# Altium PCB ST1-2-BASIS.PcbDoc (part 2 of 2)
Units mm, origin at the board's own origin, x right, y up, seen from the top; angles counter-clockwise.
Board outline 88 x 170 mm, 2 copper layers (Top Layer, Bottom Layer), stack 1.58 mm thick; 149 components, 86 nets, 501 pads, 138 vias.
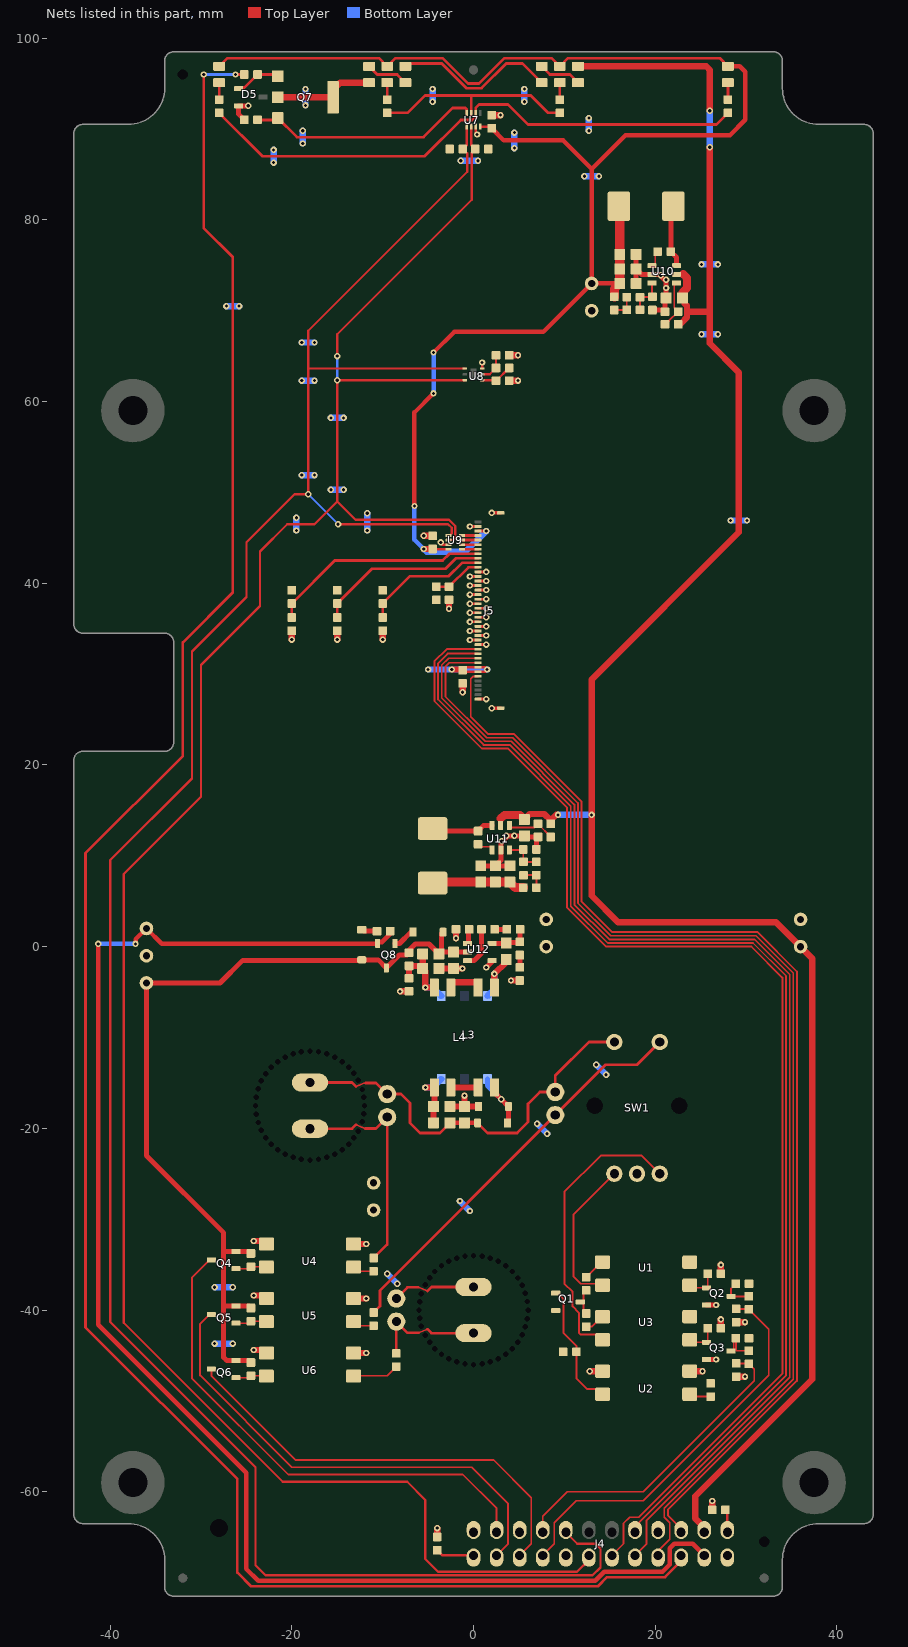
[diagram p2: the nets of this part, all layers, seen from the top]

## Part data (continued)
U9: "LP5816 4-Channel I2C Interface RGBW LED Driver", JLC Type=Extended, Manufacturer="Texas Instruments", Manufacturer 3=TI, Package=SOT586, Supplier Part Number 1=296-LP5816DRLRCT-ND, HelpURL=https://www.ti.com/lit/ds/symlink/lp5816.pdf, Manufacturer 1="Texas Instruments", Manufacturer Part Number 1=LP5816DRLR, Manufacturer Part Number 3=LP5816DRLR, Part Number=LP5816DRLR, Supplier 1=Digi-Key, Supplier 3=LCSC, Supplier Part Number 3=C47262832
U10 U11: "4-V to 36-V, 600-mA, Synchronous Step-Down Converter", Manufacturer="Texas Instruments", Manufacturer Part Number 1=LV3842XFDBVR, Package=SOT23, Supplier Part Number 1=296-LV3842XFDBVR-ND, HelpURL=https://www.ti.com/lit/ds/symlink/lv3842.pdf, Manufacturer 1="Texas Instruments", Manufacturer 3="Texas Instruments", Manufacturer Part Number 3=LV3842XFDBVR, Part Number=LV3842XF, Supplier 1=Digi-Key, Supplier 3=LCSC, Supplier Part Number 3=C22428295
U12: "TPS60400 Unregulated 60-mA Charge Pump Voltage Inverter", JLC Type=Extended, Manufacturer="Texas Instruments", Manufacturer 3=TI, Manufacturer Part Number 1=TPS60400DBVR, Manufacturer Part Number 2=TPS60400DBVT, Package=SOT23-5, Supplier Part Number 1=296-27004-1-ND, HelpURL=https://www.ti.com/lit/ds/symlink/tps60400.pdf, Manufacturer 1="Texas Instruments", Manufacturer 2="Texas Instruments", Manufacturer Part Number 3=TPS60400DBVR, Part Number=TPS60400, Supplier 1=Digi-Key, Supplier 2=Digi-Key, Supplier 3=LCSC, Supplier Part Number 2=296-12013-1-ND, Supplier Part Number 3=C9839

## Free pads (board coordinates)
  round 0 hole 2 unplated: 2(-28,-64)
  round 0 hole 0.6 unplated: B(-24,-17.5) B(-23.926,-18.439) B(-23.926,-16.561) B(-23.706,-19.354) B(-23.706,-15.646) B(-23.346,-20.224) B(-23.346,-14.776) B(-22.854,-21.027) B(-22.854,-13.973) B(-22.243,-21.743) B(-22.243,-13.257) B(-21.527,-22.354) B(-21.527,-12.646) B(-20.724,-22.846) B(-20.724,-12.154) B(-19.854,-23.206) B(-19.854,-11.794) B(-18.939,-23.426) B(-18.939,-11.574) B(-18,-23.5) B(-18,-11.5) B(-17.061,-23.426) B(-17.061,-11.574) B(-16.146,-23.206) B(-16.146,-11.794) B(-15.276,-22.846) B(-15.276,-12.154) B(-14.473,-22.354) B(-14.473,-12.646) B(-13.757,-21.743) B(-13.757,-13.257) B(-13.17,-21.06) B(-13.17,-13.94) B(-12.692,-14.704) B(-12.692,-20.296) B(-12.269,-15.724) B(-12.269,-19.276) B(-12.068,-16.602) B(-12.068,-18.398) B(-12,-17.5) B(-6,-40) B(-5.932,-40.898) B(-5.932,-39.102) B(-5.731,-41.776) B(-5.731,-38.224) B(-5.308,-42.796) B(-5.308,-37.204) B(-4.83,-43.56) B(-4.83,-36.44) B(-4.243,-44.243) B(-4.243,-35.757) B(-3.527,-44.854) B(-3.527,-35.146) B(-2.724,-45.346) B(-2.724,-34.654) B(-1.854,-45.706) B(-1.854,-34.294) B(-0.939,-45.926) B(-0.939,-34.074) B(0,-46) B(0,-34) B(0.939,-45.926) B(0.939,-34.074) B(1.854,-45.706) B(1.854,-34.294) B(2.724,-45.346) B(2.724,-34.654) B(3.527,-44.854) B(3.527,-35.146) B(4.243,-44.243) B(4.243,-35.757) B(4.854,-43.527) B(4.854,-36.473) B(5.346,-42.724) B(5.346,-37.276) B(5.706,-41.854) B(5.706,-38.146) B(5.926,-40.939) B(5.926,-39.061) B(6,-40)
  round 7 hole 3.2: M(-37.5,-59) M(-37.5,59) M(37.5,-59) M(37.5,59)

## Via types
v1: diameter 0.7, hole 0.35, Top Layer to Bottom Layer, tented both sides, 138 vias

## Nets (pads, with @x,y where several pads share a name; then routed paths per layer and width w, separated by ;. In a path a pad name is that pad's centre, name@x,y a point inside that pad or via, vN(x,y) a via of type N, cw(c..) or ccw(c..) an arc to the next point about the centre after c; other vN are vias at no path point)
+3V3: C4.1 C5.1 C16.1 C17.1 C18.1 D10.2 J5.33 J5.34 L2.2 Q8.1@-8.65,0.35 R1.1 R4.1 R7.1 R24.1 R25.1 R27.1 R29.1 R30.1 R31.1 R35.1 R42.1 TP2.1 U1.4 U3.4 U8.1@0.95,62.35 | length 65
  Top Layer w0.25: U8.1@0.95,62.35 2.425,62.35 C5.1@2.475,62.3 2.5,62.3 3.9,63.7 R27.1@3.925,63.7
  Top Layer w0.3: C4.1@-1.2,30.425 -1.112,30.338 -1.025,30.25 J5.34@0.5,30.25 1.25,30.25 v1(1.5,30.5) 1.25,30.75 J5.33@0.5,30.75 -0.875,30.75 C4.1@-1.2,30.425
  Top Layer w0.55: Q8.1@-8.65,0.35 -8.15,0.35 -6.9,1.6 D10.2@-6.65,1.6
  Top Layer w0.7: v1(-2.4,30.5) -1.275,30.5 C4.1@-1.2,30.425
  Top Layer w1: L2.2@-4.5,7 -4.4,7.1 C16.1@0.8,7.1 C17.1@2.4,7.1 C18.1@4,7.1 4.6,6.5 R42.1@5.475,6.5
  Bottom Layer w0.7: v1(-28.5,-43.7) v1(-26.5,-43.7) ; v1(-28.5,-37.5) v1(-26.5,-37.5) ; v1(-27.2,70.5) v1(-25.8,70.5) ; v1(-22,86.3) v1(-22,87.7) ; v1(-19.5,45.8) v1(-19.5,47.2) ; v1(-18.9,51.9) v1(-17.5,51.9) ; v1(-18.9,62.3) v1(-17.5,62.3) ; v1(-18.9,66.5) v1(-17.5,66.5) ; v1(-18.8,88.4) v1(-18.8,89.8) ; v1(-18.5,92.6) v1(-18.5,94.4) ; v1(-15.7,50.3) v1(-14.3,50.3) ; v1(-15.7,58.2) v1(-14.3,58.2) ; v1(-11.7,45.8) v1(-11.7,47.7) ; v1(-5,30.5) v1(-2.4,30.5) v1(1.5,30.5) ; v1(-4.5,93) v1(-4.5,94.4) ; v1(-1.4,86.5) v1(0.5,86.5) ; v1(4.5,87.9) v1(4.5,89.6) ; v1(5.6,93) v1(5.6,94.4) ; v1(12.2,84.8) v1(13.8,84.8) ; v1(12.7,89.8) v1(12.7,91.2) ; v1(25.1,67.4) v1(26.9,67.4) ; v1(25.1,75.1) v1(26.9,75.1) ; v1(28.3,46.9) v1(30.1,46.9)
+3V3_CB: C14.2 U11.1@2.05,10.65 | length 1.9
  Top Layer w0.2: C14.2@0.5,11.275 0.775,11 1.9,11 2.05,10.85 U11.1@2.05,10.65
+3V3_EN: R41.2 R43.1 U11.4 | length 5.5
  Top Layer w0.2: U11.4@3.95,13.35 4.2,13.1 6.675,13.1 R43.1@7.1,13.525 7.1,13.5 8.5,12.1 R41.2@8.5,12.075
+3V3_FB: C19.2 R44.2 R45.1 U11.3 | length 4.3
  Top Layer w0.2: U11.3@3.95,10.65 5.425,10.65 R45.1@5.475,10.7 5.475,9.35 R44.2@5.5,9.325 C19.2@6.9,9.325
+3V3_GAIN_MEAS: C19.1 R42.2 R44.1 | length 2.8
  Top Layer w0.2: R44.1@5.5,7.875 C19.1@6.9,7.875 6.925,7.85 R42.2@6.925,6.5
+3V3_OFF: C25.1 C28.1 D10.1 D12.1 Q4.2 Q5.2 Q6.2 Q8.3 R11.1 R13.1 R15.1 R49.1 TP5.1 U12.2 | length 95
  Top Layer w0.55: R15.1@-24.5,-45.775 -24.725,-45.55 Q6.2@-26.15,-45.55 -27.15,-45.55 -27.5,-45.2 -27.5,-39.55 ; R13.1@-24.5,-39.775 -24.725,-39.55 Q5.2@-26.15,-39.55 -27.5,-39.55 ; R11.1@-24.5,-33.775 -24.725,-33.55 Q4.2@-26.15,-33.55 -27.5,-33.55 ; D12.1@-12.3,-1.5 -25.4,-1.5 -27.9,-4 TP5.1@-36,-4 -36,-23 -27.5,-31.5 -27.5,-33.55 ; D12.1@-12.3,-1.45 -10.5,-1.45 Q8.3@-9.6,-2.35 -8.15,-0.9 -7.325,-0.9 R49.1@-7.1,-0.675 -7.1,-0.4 -6.4,0.3 -4.9,0.3 C28.1@-3.8,-0.8 -3.5,-0.5 -3.5,1.45 D10.1@-3.35,1.6 ; C28.1@-3.6,-0.6 C25.1@-2.2,-0.6 U12.2@-0.65,-0.6 ; -27.5,-39.55 -27.5,-33.55
+3V3_STBY: J4.22 Q8.2 R48.1 TP4.1 | length 164.3
  Top Layer w0.5: v1(-41.3,0.3) -41.3,-41.6 -25,-57.9 -25,-68.5 -23.7,-69.8 13.4,-69.8 14.4,-68.8 20.8,-68.8 21.59,-68.01 21.59,-66.238 22.098,-65.73 24.13,-65.73 J4.22@25.4,-67 ; v1(-37.2,0.3) -37.2,0.8 TP4.1@-36,2 -34.3,0.3 Q8.2@-10.6,0.3
  Top Layer w0.55: Q8.2@-10.6,0.3 Q8.2@-10.55,0.35 -10.4,0.5 -10.1,0.5 -9.175,1.425 R48.1@-9.175,1.7
  Bottom Layer w0.5: v1(-41.3,0.3) v1(-37.2,0.3)
+3V3_SW: C14.1 L2.1 U11.6 | length 6.9
  Top Layer w0.55: L2.1@-4.5,13 -4.225,12.725 C14.1@0.5,12.725 1.125,13.35 U11.6@2.05,13.35
+15V: C9.1 C15.1 D1.2 J4.21 R36.1 R41.1 TP3.1 U10.5 U11.5 | length 231.8
  Top Layer w0.55: U11.5@2.99,13.35 2.99,14.09 ; U10.5@22.35,74.01 23.09,74.01
  Top Layer w0.7: C15.1@5.6,14 6.2,14.6 7.8,14.6 R41.1@8.5,13.9 ; R41.1@8.5,13.525 R41.1@8.5,13.9 ; v1(9.3,14.5) 9.1,14.5 R41.1@8.5,13.9 ; D1.2@11.5,96.9 25.6,96.9 26,96.5 v1(26,92) ; R36.1@22.525,68.5 22.65,68.625 22.851,68.625 23.5,69.274 23.5,69.9 ; C9.1@23,71.4 23.25,71.15 23.25,70.776 23.5,70.526 23.5,69.9 ; J4.21@25.4,-64.46 25.4,-63.952 24.4,-62.952 24.4,-60.5 37.3,-47.6 37.3,-1.3 33.3,2.7 15.9,2.7 13,5.6 v1(13,14.5) 13,29.4 29.2,45.6 29.2,63.2 26,66.4 26,69.9 ; v1(26,88) 26,69.9 ; 23.5,69.9 26,69.9
  Top Layer w0.9: 2.99,14.09 3.4,14.5 5.1,14.5 C15.1@5.6,14 ; C9.1@23,71.4 23,72 23.5,72.5 23.5,73.6 23.09,74.01
  Bottom Layer w0.7: v1(9.3,14.5) v1(13,14.5) ; v1(26,88) v1(26,92)
BACKLIGHT.0: J5.7 U9.5 | length 1.8
  Top Layer w0.3: U9.5@-1.26,43.75 J5.7@0.5,43.75
BACKLIGHT.1: J5.6 U9.6 | length 1.8
  Top Layer w0.3: U9.6@-1.26,44.25 J5.6@0.5,44.25
BACKLIGHT.2: J5.5 U9.7 | length 1.8
  Top Layer w0.3: U9.7@-1.26,44.75 J5.5@0.5,44.75
BACKLIGHT.3: J5.4 U9.8 | length 1.8
  Top Layer w0.3: U9.8@-1.26,45.25 J5.4@0.5,45.25
BTN_ESC_ISO: J1.2 R12.1 SW2.2 | length 25.4
  Top Layer w0.2: -12.931,-19.6 -11.936,-20.012
  Top Layer w0.3: SW2.2@-18,-20.04 -13.372,-20.04 -12.931,-19.6 ; -11.936,-20.012 -10.742,-20.012 J1.2@-9.5,-18.77 -9.5,-32.775 R12.1@-11,-34.275
BTN_OK_ISO: J2.2 R14.1 SW1.2 | length 44.8
  Top Layer w0.3: R14.1@-11,-40.275 -10.3,-39.575 -10.3,-37.84 J2.2@9,-18.54 14.54,-13 18,-13 SW1.2@20.5,-10.5
BTN_OUT_ISO: J3.2 R16.1 SW3.2 | length 12.8
  Top Layer w0.2: -6.064,-42.512 -5.069,-42.1
  Top Layer w0.3: R16.1@-8.5,-44.775 J3.2@-8.5,-41.27 -7.258,-42.512 -6.064,-42.512 ; -5.069,-42.1 -4.628,-42.54 SW3.2@0,-42.54
BUTTON.ESC: J4.3 Q4.3 | length 56.1
  Top Layer w0.2: Q4.3@-28.85,-34.5 -29.075,-34.5 -31,-36.425 -31,-47.5 -20.4,-58.1 -1.2,-58.1 2.54,-61.84 J4.3@2.54,-64.46
BUTTON.OK: J4.4 Q5.3 | length 53.3
  Top Layer w0.2: Q5.3@-28.85,-40.5 -29.075,-40.5 -30.1,-41.525 -30.1,-47.2 -20,-57.3 -0.2,-57.3 3.81,-61.31 3.81,-65.73 J4.4@2.54,-67
BUTTON.OUT: J4.6 Q6.3 | length 48.4
  Top Layer w0.2: Q6.3@-28.85,-46.5 -28.85,-47.25 -19.6,-56.5 2.2,-56.5 6.35,-60.65 6.35,-65.73 J4.6@5.08,-67
DISPLAY.CS: J4.16 J5.31 | length 136.3
  Top Layer w0.2: J5.31@0.5,31.75 -2.75,31.75 -3.5,31 -3.5,27.369 1.269,22.6 4.131,22.6 11.1,15.631 11.1,4.631 14.931,0.8 30.931,0.8 34.8,-3.069 34.8,-47.4 19.05,-63.15 19.05,-65.73 J4.16@17.78,-67
DISPLAY.MISO: J4.19 J5.35 | length 127.3
  Top Layer w0.2: J5.35@0.5,29.75 -0.05,29.75 -0.3,29.5 -0.3,25.3 1.6,23.4 4.463,23.4 11.9,15.963 11.9,4.963 15.263,1.6 31.263,1.6 35.6,-2.737 35.6,-47.8 21.4,-62 21.4,-62.6 22.86,-64.06 J4.19@22.86,-64.46
DISPLAY.MOSI: J4.18 J5.32 | length 135.2
  Top Layer w0.2: J5.32@0.5,31.25 -2.65,31.25 -3.1,30.8 -3.1,27.534 1.434,23 4.297,23 11.5,15.797 11.5,4.797 15.097,1.2 31.097,1.2 35.2,-2.903 35.2,-47.6 21,-61.8 21,-62.8 21.59,-63.39 21.59,-65.222 20.32,-66.492 J4.18@20.32,-67
DISPLAY.SCK: J4.15 J5.30 | length 134.3
  Top Layer w0.2: J5.30@0.5,32.25 -2.85,32.25 -3.9,31.2 -3.9,27.203 1.103,22.2 3.966,22.2 10.7,15.466 10.7,4.466 14.766,0.4 30.766,0.4 34.4,-3.234 34.4,-47.2 17.78,-63.82 J4.15@17.78,-64.46
DISPLAY.WR: J4.14 J5.29 | length 139
  Top Layer w0.2: J5.29@0.5,32.75 -2.95,32.75 -4.3,31.4 -4.3,27.037 0.937,21.8 3.8,21.8 10.3,15.3 10.3,4.3 14.6,0 30.6,0 34,-3.4 34,-47 18.2,-62.8 17.2,-62.8 16.51,-63.49 16.51,-65.73 J4.14@15.24,-67
ENCODER.A: C1.1 J4.8 R3.2 | length 44
  Top Layer w0.2: J4.8@7.62,-67 8.89,-65.73 8.89,-63.41 11.3,-61 18.7,-61 32.5,-47.2 32.5,-42.125 R3.2@30.3,-39.925 30.275,-39.9 28.925,-39.9 C1.1@28.9,-39.875
ENCODER.B: C2.1 J4.7 R9.2 | length 35.2
  Top Layer w0.2: J4.7@7.62,-63.98 J4.7@7.62,-64.46 7.62,-62.68 10.3,-60 18.7,-60 30.9,-47.8 30.9,-46.525 R9.2@30.3,-45.925 30.275,-45.9 28.925,-45.9 C2.1@28.9,-45.875
ENCODER_A: Q2.3 R1.2 R3.1 | length 3.6
  Top Layer w0.2: R1.2@28.875,-37.1 28.35,-37.625 Q2.3@28.35,-38.5 30.275,-38.5 R3.1@30.3,-38.475
ENCODER_B: Q3.3 R7.2 R9.1 | length 4.4
  Top Layer w0.2: Q3.3@28.35,-44.5 28.463,-44.5 28.638,-44.325 28.638,-43.337 R7.2@28.875,-43.1 28.875,-44.358 28.992,-44.475 R9.1@30.3,-44.475
GND: C1.2 C2.2 C3.2 C4.2 C5.2 C6.2 C7.2 C9.2 C10.2 C11.2 C12.2 C15.2 C16.2 C17.2 C18.2 C23.2 C25.2 C26.2 C29.2 D5.2 J4.1 J4.5 J4.10 J4.17 J4.24 J5.2 J5.12 J5.13 J5.14 J5.15 J5.16 J5.17 J5.18 J5.19 J5.20 J5.21 J5.22 J5.23 J5.24 J5.25 J5.26 J5.27 J5.28 J5.40 J5.M1 J5.M2 Q2.2 Q3.2 R6.2 R10.2 R17.1 R18.2 R26.2 R28.2 R32.2 R33.2 R34.2 R38.2 R40.2 R43.2 R45.2 R50.2 TP7.1 TP8.1 TP9.1 TP10.1 U2.2 U4.3 U5.3 U6.3 U7.3 U8.3 U9.3 U10.2 U11.2 U12.4 | length 77.9
  Top Layer w0.25: U8.3@0.95,63.65 v1(0.95,64.3)
  Top Layer w0.3: v1(-3.6,44.5) -3.35,44.25 U9.3@-2.74,44.25 ; v1(-0.4,33.75) J5.27@0.5,33.75 ; v1(-0.4,34.75) J5.25@0.5,34.75 ; v1(-0.4,35.75) J5.23@0.5,35.75 ; v1(-0.4,36.75) J5.21@0.5,36.75 ; v1(-0.4,37.75) J5.19@0.5,37.75 ; v1(-0.4,38.75) J5.17@0.5,38.75 ; v1(-0.4,39.75) J5.15@0.5,39.75 ; v1(-0.4,40.75) J5.13@0.5,40.75 ; v1(-0.4,46.25) J5.2@0.5,46.25 ; U7.3@0.25,90.26 0.25,89.55 v1(0.4,89.4) ; J5.40@0.5,27.25 v1(1.4,27.25) ; J5.28@0.5,33.25 v1(1.4,33.25) ; J5.26@0.5,34.25 v1(1.4,34.25) ; J5.24@0.5,35.25 v1(1.4,35.25) ; J5.22@0.5,36.25 v1(1.4,36.25) ; J5.20@0.5,37.25 v1(1.4,37.25) ; J5.18@0.5,38.25 v1(1.4,38.25) ; J5.16@0.5,39.25 v1(1.4,39.25) ; J5.14@0.5,40.25 v1(1.4,40.25) ; J5.12@0.5,41.25 v1(1.4,41.25)
  Top Layer w0.4: v1(2,26.25) J5.M2@3,26.25 ; v1(2,47.75) J5.M1@3,47.75
  Top Layer w0.55: R26.2@-25.225,91 -25.85,91.625 D5.2@-25.85,92.55 v1(-24.8,92.55) ; C16.2@0.8,8.9 C17.2@2.4,8.9 ; v1(1.4,-2.3) 2.05,-1.65 U12.4@2.05,-1.55 ; C18.2@4,8.9 C17.2@2.4,8.9 ; R45.2@6.925,10.7 6.925,11.9 R43.2@7.1,12.075 5.725,12.075 C15.2@5.6,12.2 v1(4.5,12.2) v1@3.8,12.2 ; C12.2@17.9,73 C11.2@17.9,74.6 ; C10.2@17.9,76.2 C11.2@17.9,74.6 ; R40.2@19.7,70.075 20.9,70.075 R38.2@21.075,69.9 21.075,71.275 C9.2@21.2,71.4 21.2,73.2 20.4,74 18.5,74 C11.2@17.9,74.6 ; Q3.2@25.65,-45.45 v1(26.7,-45.45) ; Q2.2@25.65,-39.45 v1(26.7,-39.45) ; C17.2@2.4,8.9 3,9.5 U11.2@3,10.65 3,11.4 3.15,11.55 v1@3.546,11.946 ; v1@3.546,11.946 v1@3.8,12.2 ; v1@3.546,11.946 3.7,12.1 v1@3.8,12.2
  Top Layer w0.7: v1(-24.2,-44.4) -23.13,-44.4 U6.3@-22.8,-44.73 ; v1(-24.2,-38.4) -23.13,-38.4 U5.3@-22.8,-38.73 ; v1(-24.2,-32.4) -23.13,-32.4 U4.3@-22.8,-32.73 ; v1(-20,33.8) R34.2@-20,34.775 ; v1(-15,33.8) R33.2@-15,34.775 ; v1(-10,33.8) R32.2@-10,34.775 ; v1(-8.075,-4.925) R50.2@-7.1,-4.925 ; v1(-5.475,45.225) C7.2@-4.5,45.225 ; R17.1@-4,-64.975 v1(-4,-64) ; C29.2@-3.8,-2.4 C25.2@-2.2,-2.4 v1(-1.225,-2.4) ; v1(-2.7,37.2) C6.2@-2.7,38.175 ; v1(-1.925,0.925) C26.2@-1.925,1.9 ; v1(-1.2,28) C4.2@-1.2,28.975 ; C3.2@2,91.525 v1(2.975,91.525) ; C5.2@3.925,62.3 v1(4.9,62.3) ; R28.2@3.925,65.1 v1(4.9,65.1) ; v1(4.125,-3.725) C23.2@5.1,-3.725 ; U2.2@23.8,-46.73 v1(25.2,-46.73) ; R18.2@26.275,-62 v1(26.275,-61.025) ; R10.2@27.225,-42 v1(27.225,-41.025) ; R6.2@27.225,-36 v1(27.225,-35.025) ; C2.2@28.9,-47.325 v1(29.875,-47.325) ; C1.2@28.9,-41.325 v1(29.875,-41.325)
  other v1: 3.1,11.6 3.6,12.2 21.2,72.5 21.2,73.4 20.6,73.9
GND_ISO: C24.2 C27.2 D13.2 SW1.C TP11.1 U2.3 U4.2 U5.2 U6.2 | length 9.9
  Top Layer w0.7: U6.2@-13.2,-44.73 v1(-11.8,-44.73) ; U5.2@-13.2,-38.73 v1(-11.8,-38.73) ; U4.2@-13.2,-32.73 v1(-11.8,-32.73) ; C27.2@-2.6,-17.6 C24.2@-1,-17.6 ; v1(-1,-16.4) C24.2@-1,-17.6 ; D13.2@0.55,-17.6 C24.2@-1,-17.6 ; v1(12.8,-46.73) U2.3@14.2,-46.73
HV_DET: J4.20 R19.1 | length 235.6
  Top Layer w0.3: v1(-29.7,96) -29.7,79.1 -26.5,75.9 -26.5,39 -32,33.5 -32,21 -42.7,10.3 -42.7,-41.9 -26,-58.6 -26,-68.9 -24.5,-70.4 13.7,-70.4 14.7,-69.4 21.1,-69.4 22.86,-67.64 J4.20@22.86,-67 ; v1(-26.2,96) R19.1@-25.225,96
  Bottom Layer w0.3: v1(-29.7,96) v1(-26.2,96)
I2C.SCL: J4.9 R25.2 U7.1@-0.75,90.26 U8.4 U9.1@-2.74,45.25 | length 263.6
  Top Layer w0.25: -24.398,-56.902 -40,-41.3 -40,9.5 -31,18.5 -31,32.5 -25,38.5 -25,44.5 -19.7,49.8 v1(-18.2,49.8) -18.2,63.65 ; -24.395,-56.905 -24,-57.3 -24,-68.1 -22.9,-69.2 13.1,-69.2 13.97,-68.33 13.97,-66.238 13.462,-65.73 11.43,-65.73 J4.9@10.16,-64.46 ; v1(-14.9,46.5) -2.8,46.5 -2.4,46.1 -2.4,45.5 -2.65,45.25 U9.1@-2.74,45.25 ; U8.4@-0.95,63.65 -18.2,63.65 ; U7.1@-0.75,90.26 -0.75,88.225 R25.2@-1.175,87.8 -0.7,87.325 -0.7,85.3 -18.2,67.8 -18.2,63.65
  Bottom Layer w0.2: v1(-18.2,49.8) v1(-14.9,46.5)
I2C.SDA: J4.12 R24.2 U7.2 U8.6 U9.2 | length 247.3
  Top Layer w0.25: v1(-15,65) -15,67.4 -0.2,82.2 -0.2,87.425 R24.2@0.175,87.8 -0.25,88.225 U7.2@-0.25,90.26 ; U9.2@-2.74,44.75 -2.25,44.75 -2,45 -2,46.3 -2.7,47 -13,47 -15,49 ; U8.6@-0.95,62.35 v1(-15,62.35) -15,49 ; J4.12@12.7,-67 12.7,-67.5 11.4,-68.8 -3.9,-68.8 -5.3,-67.4 -5.3,-60.9 -7.3,-58.9 -21,-58.9 -38.496,-41.404 -38.496,8.004 -30,16.5 -30,31 -23.5,37.5 -23.5,43.5 -20.5,46.5 -17.5,46.5 -15,49
  Bottom Layer w0.25: v1(-15,62.35) v1(-15,65)
LCD_IM0: J5.10 R29.2 R32.1 | length 13.9
  Top Layer w0.3: R32.1@-10,36.225 R29.2@-10,37.775 -7,40.775 -2.725,40.775 -1.25,42.25 J5.10@0.5,42.25
LCD_IM1: J5.9 R30.2 R33.1 | length 19.1
  Top Layer w0.3: R33.1@-15,36.225 R30.2@-15,37.775 -11.175,41.6 -3.1,41.6 -1.95,42.75 J5.9@0.5,42.75
LCD_IM2: J5.8 R31.2 R34.1 | length 24.3
  Top Layer w0.3: R34.1@-20,36.225 R31.2@-20,37.775 -15.275,42.5 -3.4,42.5 -2.65,43.25 J5.8@0.5,43.25
LCD_RESET: C6.1 J5.11 R35.2 | length 5.5
  Top Layer w0.3: R35.2@-4.1,39.625 C6.1@-2.7,39.625 -0.575,41.75 J5.11@0.5,41.75
NetC20_1: C20.1 C21.1 R46.1 U12.5 | length 4.5
  Top Layer w0.55: U12.5@2.05,0.35 3.55,0.35 3.663,0.463 5.038,0.463 R46.1@5.1,0.525 5.1,1.875 C21.1@5.125,1.9
NetC20_2: C20.2 L3.1@2.3,-4.5 L4.3 | length 6.4
  Top Layer w0.7: L3.1@2.3,-4.5 v1(2.3,-3) 3.6,-1.7 C20.2@3.6,-1.4
  Bottom Layer w0.7: L4.3@1.54,-5.43 2.3,-4.67 v1(2.3,-3)
NetC21_2: C21.2 R47.1 | length 1.3
  Top Layer w0.55: R47.1@2.325,1.9 C21.2@3.675,1.9
NetC22_2: C22.2 C27.1 L3.5 L4.6 | length 7.1
  Top Layer w0.7: v1(-5.3,-15.5) L3.5@-4.3,-15.5 -4.3,-17.5 C27.1@-4.4,-17.6 C22.2@-4.4,-19.4
  Bottom Layer w0.7: v1(-5.3,-15.5) -4.47,-15.5 L4.6@-3.54,-14.57
NetC23_1: C23.1 R46.2 | length 1.3
  Top Layer w0.55: C23.1@5.1,-2.275 R46.2@5.1,-0.925
NetC26_1: C26.1 U12.1@-0.65,0.35 | length 1.7
  Top Layer w0.55: U12.1@-0.65,0.35 -0.562,0.35 -0.562,1.812 C26.1@-0.475,1.9
NetC28_2: C28.2 C29.1 L3.4 L4.1@-3.54,-5.43 R49.2 R50.1 | length 9.9
  Top Layer w0.7: R50.1@-7.1,-3.475 R49.2@-7.1,-2.125 -5.875,-2.125 C29.1@-5.6,-2.4 ; C28.2@-5.6,-0.8 C29.1@-5.6,-2.4 ; L3.4@-4.3,-4.5 v1(-5.3,-4.5) -5.3,-2.7 C29.1@-5.6,-2.4
  Bottom Layer w0.7: v1(-5.3,-4.5) -4.47,-4.5 L4.1@-3.54,-5.43
NetD1_1: D1.1 D2.2 | length 4.7
  Top Layer w0.3: D2.2@7.5,96.9 8.4,96 10.6,96 D1.1@11.5,95.1
NetD2_1: D2.1 D3.2 | length 18.2
  Top Layer w0.3: D3.2@-7.5,96.9 -7.2,97.2 -3.5,97.2 -0.8,94.5 0.9,94.5 3.6,97.2 5.4,97.2 D2.1@7.5,95.1
NetD3_1: D3.1 D4.2 | length 4.7
  Top Layer w0.3: D4.2@-11.5,96.9 -10.6,96 -8.4,96 D3.1@-7.5,95.1
NetD4_1: D4.1 Q7.2 Q7.4 | length 11.2
  Top Layer w0.7: Q7.2@-21.55,93.5 Q7.4@-15.45,93.5 -15.45,94.35 -14.7,95.1 D4.1@-11.5,95.1
NetD5_1: D5.1@-25.85,94.45 Q7.1 R19.2 | length 5
  Top Layer w0.3: D5.1@-25.85,94.45 -25.726,94.574 -25.201,94.574 R19.2@-23.775,96 -21.75,96 Q7.1@-21.55,95.8
NetD6_1: D6.1 R20.1 | length 1.9
  Top Layer w0.3: R20.1@-9.5,93.225 D6.1@-9.5,95.1
NetD7_1: D7.1 R21.1 | length 1.9
  Top Layer w0.3: R21.1@9.5,93.225 D7.1@9.5,95.1
NetD8_1: D8.1 R22.1 | length 1.9
  Top Layer w0.3: R22.1@-28,93.225 D8.1@-28,95.1
NetD9_1: D9.1 R23.1 | length 1.9
  Top Layer w0.3: R23.1@28,93.225 D9.1@28,95.1
NetD11_2: D11.2 D13.1 L3.8 L4.4 | length 7.4
  Top Layer w0.55: L3.8@2.3,-15.5 2.3,-16.05 v1(3.05,-16.8) D13.1@3.85,-17.6 3.85,-19.3 D11.2@3.75,-19.4
  Bottom Layer w0.55: L4.4@1.54,-14.57 1.54,-15.29 v1(3.05,-16.8)
NetD12_2: D12.2 R48.2 | length 1.7
  Top Layer w0.55: D12.2@-12.3,1.85 -12.2,1.85 -12.075,1.725 -11.825,1.725 -11.8,1.7 R48.2@-10.625,1.7
NetJ4_2: J4.2 R17.2 | length 4.2
  Top Layer w0.3: R17.2@-4,-66.425 -3.425,-67 J4.2@0,-67
NetJ4_23: J4.23 R18.1 | length 2.5
  Top Layer w0.3: R18.1@27.725,-62 27.94,-62.215 J4.23@27.94,-64.46
NetL3_2: L3.2 L3.3 | length 3.8
  Top Layer w0.7: L3.3@-2.5,-4.5 -2.5,-4.2 -2.2,-3.9 0.2,-3.9 0.5,-4.2 L3.2@0.5,-4.5
NetL3_6: L3.6 L3.7 | length 3
  Top Layer w0.7: L3.6@-2.5,-15.5 L3.7@0.5,-15.5
NetQ1_1: Q1.1@9.05,-38.15 R5.2 U2.4 | length 14
  Top Layer w0.2: Q1.1@9.05,-38.15 9.275,-38.15 9.9,-38.775 9.9,-42.5 11.325,-43.925 R5.2@11.325,-44.6 11.325,-47.525 12.5,-48.7 13.63,-48.7 U2.4@14.2,-49.27
NetQ1_3: Q1.3 R2.1 R8.1 | length 3.4
  Top Layer w0.2: R8.1@12.4,-40.375 12.1,-40.075 12.1,-39.2 Q1.3@12,-39.1 ; R2.1@12.4,-37.825 12.1,-38.125 12.1,-39 Q1.3@12,-39.1 ; Q1.3@12,-39.1 Q1.3@11.75,-39.1 Q1.3@12,-39.1
NetQ2_1: Q2.1@25.65,-37.55 R6.1 U1.3 | length 3.6
  Top Layer w0.2: U1.3@23.8,-37.27 24.08,-37.55 Q2.1@25.65,-37.55 25.775,-37.425 R6.1@25.775,-36
NetQ3_1: Q3.1@25.65,-43.55 R10.1 U3.3 | length 3.6
  Top Layer w0.2: U3.3@23.8,-43.27 24.08,-43.55 Q3.1@25.65,-43.55 25.775,-43.425 R10.1@25.775,-42
NetQ4_1: Q4.1@-26.15,-35.45 R11.2 U4.4 | length 3.5
  Top Layer w0.2: Q4.1@-26.15,-35.45 -24.725,-35.45 R11.2@-24.5,-35.225 -22.845,-35.225 U4.4@-22.8,-35.27
NetQ5_1: Q5.1@-26.15,-41.45 R13.2 U5.4 | length 3.5
  Top Layer w0.2: Q5.1@-26.15,-41.45 -24.725,-41.45 R13.2@-24.5,-41.225 -22.845,-41.225 U5.4@-22.8,-41.27
NetQ6_1: Q6.1@-26.15,-47.45 R15.2 U6.4 | length 3.5
  Top Layer w0.2: Q6.1@-26.15,-47.45 -25.311,-47.45 -24.725,-47.45 R15.2@-24.5,-47.225 -22.845,-47.225 U6.4@-22.8,-47.27
NetQ7_3: Q7.3 R26.1 U7.8 | length 25.8
  Top Layer w0.3: R26.1@-23.775,91 -21.75,91 Q7.3@-21.55,91.2 -19.45,89.1 -5.5,89.1 -2.3,92.3 -0.9,92.3 -0.75,92.15 U7.8@-0.75,91.74
NetR2_2: R2.2 U1.1@14.2,-34.73 | length 2.5
  Top Layer w0.2: R2.2@12.4,-36.375 14.045,-34.73 U1.1@14.2,-34.73
NetR4_2: R4.2 U2.1@23.8,-49.27 | length 2.4
  Top Layer w0.2: U2.1@23.8,-49.27 24.055,-49.525 R4.2@26.1,-49.525
NetR8_2: R8.2 U3.1@14.2,-40.73 | length 2.3
  Top Layer w0.2: R8.2@12.4,-41.825 13.005,-41.825 14.1,-40.73 U3.1@14.2,-40.73
NetR12_2: R12.2 U4.1@-13.2,-35.27 | length 2.4
  Top Layer w0.2: U4.1@-13.2,-35.27 -12.745,-35.725 R12.2@-11,-35.725
NetR14_2: R14.2 U5.1@-13.2,-41.27 | length 2.4
  Top Layer w0.2: U5.1@-13.2,-41.27 -12.745,-41.725 R14.2@-11,-41.725
NetR16_2: R16.2 U6.1@-13.2,-47.27 | length 5.1
  Top Layer w0.2: U6.1@-13.2,-47.27 -13.155,-47.225 -9.5,-47.225 R16.2@-8.5,-46.225
NetR20_2: R20.2 R21.2 U7.7 | length 22.6
  Top Layer w0.3: R20.2@-9.5,91.775 -7.251,91.775 -5.326,93.7 -0.25,93.7 ; U7.7@-0.25,91.74 -0.25,93.7 ; R21.2@9.5,91.775 8.225,91.775 6.3,93.7 -0.25,93.7
NetR22_2: R22.2 R23.2 U7.6 | length 62.4
  Top Layer w0.3: R22.2@-28,91.775 -23.225,87 -5.4,87 -1.4,91 -0.103,91 0.25,91.353 U7.6@0.25,91.74 0.25,92.35 0.6,92.7 3.8,92.7 6,90.5 26.725,90.5 R23.2@28,91.775
NetR27_2: R27.2 R28.1 U8.2 | length 3.2
  Top Layer w0.25: U8.2@0.95,63 1.775,63 R27.2@2.475,63.7 R28.1@2.475,65.1
NetR47_2: R47.2 U12.3 | length 4.5
  Top Layer w0.55: U12.3@-0.65,-1.55 0.05,-1.55 0.9,-0.7 0.9,1.875 R47.2@0.875,1.9
NetSW1_A: SW1.A U1.2 | length 16.8
  Top Layer w0.2: U1.2@14.2,-37.27 14.03,-37.1 11.8,-37.1 11,-36.3 11,-29.5 SW1.A@15.5,-25
NetSW1_B: SW1.B U3.2 | length 32.1
  Top Layer w0.2: U3.2@14.2,-43.27 13.63,-42.7 11.8,-42.7 11.6,-42.5 11.6,-40.3 10.9,-39.6 10.9,-38 10,-37.1 10,-27 14,-23 18.5,-23 SW1.B@20.5,-25
VCC_ISO: C22.1 C24.1 D11.1 J1.1 J2.1 J3.1 Q1.2 R5.1 SW1.1 SW2.1 SW3.1 TP6.1 | length 60
  Top Layer w0.2: -12.931,-15.4 -11.936,-14.988 ; -6.064,-37.488 -5.069,-37.9
  Top Layer w0.3: SW2.1@-18,-14.96 -13.372,-14.96 -12.931,-15.4 ; -11.9,-15 -10.73,-15 J1.1@-9.5,-16.23 -7.97,-16.23 -7,-17.2 -7,-19.4 -5.9,-20.5 -3.7,-20.5 C22.1@-2.6,-19.4 ; J3.1@-8.5,-38.73 -7.27,-37.5 -6.1,-37.5 ; -5.069,-37.9 -4.628,-37.46 SW3.1@0,-37.46 ; D11.1@0.45,-19.4 1.55,-20.5 4.8,-20.5 6,-19.3 6,-17.3 7.3,-16 J2.1@9,-16 9,-14.2 12.7,-10.5 SW1.1@15.5,-10.5
  Top Layer w0.5: C22.1@-2.6,-19.4 C24.1@-1,-19.4 D11.1@0.45,-19.4
  Bottom Layer w0.7: v1(-9.5,-36) v1(-8.4,-37.1) ; v1(-1.5,-28) v1(-0.4,-29.1) ; v1(7,-19.5) v1(8.1,-20.6) ; v1(13.5,-13) v1(14.6,-14.1)
VLED: C3.1 C7.1 C10.1 C11.1 C12.1 D6.2 D7.2 D8.2 D9.2 J5.3 L1.2 R37.1 TP1.1 U7.4 U9.4 | length 182.4
  Top Layer w0.3: D8.2@-28,96.9 -27.1,97.8 -10.4,97.8 D6.2@-9.5,96.9 -8.6,97.8 -3.4,97.8 -0.6,95 0.6,95 3.4,97.8 8.6,97.8 D7.2@9.5,96.9 10.4,97.8 27.1,97.8 D9.2@28,96.9 ; C7.1@-4.5,43.775 -4.475,43.75 U9.4@-2.74,43.75 ; J5.3@0.5,45.75 v1(1.4,45.75) ; U7.4@0.75,90.26 1.815,90.26 C3.1@2,90.075
  Top Layer w0.5: v1(-6.5,48.5) -6.5,58.8 v1(-4.4,60.9) ; v1(-4.4,65.4) -2.1,67.7 7.7,67.7 TP1.1@13,73 ; C3.1@2,90.075 3.336,88.739 9.861,88.739 13,85.6 ; C12.1@16.1,73 TP1.1@13,73 ; D9.2@28,96.9 29.3,96.9 29.9,96.3 29.9,91 28.231,89.331 16.731,89.331 13,85.6 ; TP1.1@13,73 13,85.6
  Top Layer w0.7: v1(-5.475,43.775) C7.1@-4.5,43.775
  Top Layer w1: R37.1@15.5,71.525 15.5,72.4 C12.1@16.1,73 16.1,81.4 L1.2@16,81.5
  Bottom Layer w0.5: v1(-6.5,48.5) -6.5,44.8 v1(-5.475,43.775) ; v1(-4.4,60.9) v1(-4.4,65.4)
  Bottom Layer w0.7: v1(-5.475,43.775) -5.15,43.45 -0.9,43.45 v1(1.4,45.75)
VLED_CB: C8.2 U10.1@19.65,74.95 | length 1.9
  Top Layer w0.2: U10.1@19.65,74.95 19.85,74.95 20,75.1 20,76.225 C8.2@20.275,76.5
VLED_EN: R36.2 R38.1 U10.4 | length 5.5
  Top Layer w0.2: R36.2@21.075,68.5 21.45,68.875 21.5,68.875 R38.1@22.525,69.9 22.1,70.325 22.1,72.8 U10.4@22.35,73.05
VLED_FB: C13.2 R39.2 R40.1 U10.3 | length 4.3
  Top Layer w0.2: R39.2@18.325,70.1 C13.2@18.325,71.5 18.35,71.525 R40.1@19.7,71.525 19.65,71.575 U10.3@19.65,73.05
VLED_GAIN_MEAS: C13.1 R37.2 R39.1 | length 2.8
  Top Layer w0.2: R37.2@15.5,70.075 16.85,70.075 R39.1@16.875,70.1 C13.1@16.875,71.5
VLED_SW: C8.1 L1.1 U10.6 | length 6.9
  Top Layer w0.55: L1.1@22,81.5 21.725,81.225 C8.1@21.725,76.5 22.35,75.875 U10.6@22.35,74.95
pads on no net: D5.1@-26.1,95.1 D5.3 FM1.1 FM2.1 FM3.1 FM4.1 FM5.1 FM6.1 J4.11 J4.13 J5.1 J5.36 J5.37 J5.38 J5.39 L3.1@3.2,-3.9 L4.1@-4.559,-5.545 L4.2 L4.5 M3.0 M7.0 Q1.1@8.8,-37.5 Q2.1@25.4,-36.9 Q3.1@25.4,-42.9 Q4.1@-25.9,-36.1 Q5.1@-25.9,-42.1 Q6.1@-25.9,-48.1 Q8.1@-8,0.6 SW1.M U1.1@14.2,-33.455 U2.1@23.8,-50.545 U3.1@14.2,-39.455 U4.1@-13.2,-36.545 U5.1@-13.2,-42.545 U6.1@-13.2,-48.545 U7.1@-1.175,90.225 U7.5 U8.1@1.7,61.95 U8.5 U8.EP U9.1@-2.775,45.675 U10.1@19.4,75.6 U11.1@1.4,10.4 U12.1@-0.9,1

## Polygon pours and split planes (outlines as drawn)
+3V3 on Top Layer "+3V3_L01_P028" (solid, remove dead copper, pour order 28): -43.5,89.5 cw(c-43,89.5) -43,90 -38,90 ccw(c-38,94.5) -33.5,94.5 -33.5,97.5 cw(c-33,97.5) -33,98 33,98 cw(c33,97.5) 33.5,97.5 33.5,94.5 ccw(c38,94.5) 38,90 43,90 cw(c43,89.5) 43.5,89.5 43.5,-62.5 cw(c43,-62.5) 43,-63 38,-63 ccw(c38,-67.5) 33.5,-67.5 33.5,-70.5 cw(c33,-70.5) 33,-71 -33,-71 cw(c-33,-70.5) -33.5,-70.5 -33.5,-67.5 ccw(c-38,-67.5) -38,-63 -43,-63 cw(c-43,-62.5) -43.5,-62.5
VCC_ISO on Top Layer "VCC_ISO_L01_P027" (solid, remove dead copper, pour order 27): 23.5,-9 cw(c23.5,-10) 24.5,-10 24.5,-24 cw(c22,-24) 22,-26.5 ccw(c22,-33.5) 15,-33.5 15,-49.8 cw(c14.8,-49.8) 14.8,-50 13.414,-50 cw(c13.414,-46.586) 11,-49 ccw(c8.586,-51.413) 8.586,-48 -13.8,-48 cw(c-13.8,-47.8) -14,-47.8 -14,-28.5 ccw(c-18,-28.5) -18,-24.5 cw(c-18,-17.5) -25,-17.5 cw(c-18,-17.5) -18,-10.5 -17.828,-10.5 cw(c-17.828,-17.328) -13,-12.5 ccw(c-9.379,-8.879) -9.379,-14 3.964,-14 ccw(c3.964,-5.464) 10,-11.5 cw(c16.035,-17.535) 16.036,-9
GND on Bottom Layer "GND_L02_P030" (solid, remove dead copper, pour order 30): -43.5,89.5 cw(c-43,89.5) -43,90 -38,90 ccw(c-38,94.5) -33.5,94.5 -33.5,97.5 cw(c-33,97.5) -33,98 33,98 cw(c33,97.5) 33.5,97.5 33.5,94.5 ccw(c38,94.5) 38,90 43,90 cw(c43,89.5) 43.5,89.5 43.5,-62.5 cw(c43,-62.5) 43,-63 38,-63 ccw(c38,-67.5) 33.5,-67.5 33.5,-70.5 cw(c33,-70.5) 33,-71 -33,-71 cw(c-33,-70.5) -33.5,-70.5 -33.5,-67.5 ccw(c-38,-67.5) -38,-63 -43,-63 cw(c-43,-62.5) -43.5,-62.5
GND_ISO on Bottom Layer "GND_ISO_L02_P029" (solid, remove dead copper, pour order 29): 23.5,-9 cw(c23.5,-10) 24.5,-10 24.5,-24 cw(c22,-24) 22,-26.5 ccw(c22,-33.5) 15,-33.5 15,-49.8 cw(c14.8,-49.8) 14.8,-50 13.414,-50 cw(c13.414,-46.586) 11,-49 ccw(c8.586,-51.413) 8.586,-48 -13.8,-48 cw(c-13.8,-47.8) -14,-47.8 -14,-28.5 ccw(c-18,-28.5) -18,-24.5 cw(c-18,-17.5) -25,-17.5 cw(c-18,-17.5) -18,-10.5 -17.828,-10.5 cw(c-17.828,-17.328) -13,-12.5 ccw(c-9.379,-8.879) -9.379,-14 3.964,-14 ccw(c3.964,-5.464) 10,-11.5 cw(c16.035,-17.535) 16.036,-9

## Keep-outs
Top Layer:
  circle w0.6: c0,-40 r6
  circle w0.6: c-18,-17.5 r6
  region: 18,4 cw(c18,8) 14,8 14,27 cw(c18,27) 18,31 34,31 cw(c34,27) 38,27 38,8 cw(c34,8) 34,4
Bottom Layer:
  circle w0.6: c0,-40 r6
  circle w0.6: c-18,-17.5 r6
  region: 18,4 cw(c18,8) 14,8 14,27 cw(c18,27) 18,31 34,31 cw(c34,27) 38,27 38,8 cw(c34,8) 34,4

## Other copper
Top Layer:
  region net GND: 0.2,8.36 ccw(c0.26,8.36) 0.26,8.3 4.54,8.3 ccw(c4.54,8.36) 4.6,8.36 4.6,9.44 ccw(c4.54,9.44) 4.54,9.5 3.994,9.5 cw(c3.994,10.219) 3.275,10.219 3.275,11.081 cw(c3.794,11.081) 3.794,11.6 5.93,11.6 cw(c5.93,11.08) 6.45,11.08 6.45,10.32 ccw(c6.545,10.32) 6.545,10.225 7.305,10.225 ccw(c7.305,10.32) 7.4,10.32 7.4,11.273 cw(c7.902,11.273) 7.547,11.628 ccw(c7.48,11.695) 7.575,11.695 7.575,12.455 ccw(c7.48,12.455) 7.48,12.55 6.744,12.55 cw(c6.744,13.344) 6.182,12.782 ccw(c6.14,12.74) 6.14,12.8 5.06,12.8 ccw(c5.06,12.74) 5.018,12.782 cw(c4.577,13.223) 4.577,12.6 3.2,12.6 ccw(c3.2,12.125) 2.725,12.125 2.725,10.219 cw(c2.006,10.219) 2.006,9.5 0.26,9.5 ccw(c0.26,9.44) 0.2,9.44
  region net GND: 17.36,76.8 ccw(c17.36,76.74) 17.3,76.74 17.3,72.46 ccw(c17.36,72.46) 17.36,72.4 18.44,72.4 ccw(c18.44,72.46) 18.5,72.46 18.5,73.006 cw(c19.219,73.006) 19.219,73.725 20.081,73.725 cw(c20.081,73.206) 20.6,73.206 20.6,71.07 cw(c20.08,71.07) 20.08,70.55 19.32,70.55 ccw(c19.32,70.455) 19.225,70.455 19.225,69.695 ccw(c19.32,69.695) 19.32,69.6 20.273,69.6 cw(c20.273,69.098) 20.628,69.453 ccw(c20.695,69.52) 20.695,69.425 21.455,69.425 ccw(c21.455,69.52) 21.55,69.52 21.55,70.256 cw(c22.344,70.256) 21.782,70.818 ccw(c21.74,70.86) 21.8,70.86 21.8,71.94 ccw(c21.74,71.94) 21.782,71.982 cw(c22.223,72.423) 21.6,72.423 21.6,73.8 ccw(c21.125,73.8) 21.125,74.275 19.219,74.275 cw(c19.219,74.994) 18.5,74.994 18.5,76.74 ccw(c18.44,76.74) 18.44,76.8
  region net VLED_SW: 20.75,82.875 20.75,80.125 ccw(c21,80.125) 20.823,79.948 cw(c19.793,78.918) 21.25,78.918 21.25,76.12 ccw(c23.193,76.12) 21.819,74.746 21.87,74.695 ccw(c21.919,74.744) 21.919,74.675 22.781,74.675 ccw(c22.781,74.744) 22.83,74.695 ccw(c21.816,75.709) 23.25,75.709 23.25,82.875 ccw(c23,82.875) 23,83.125 21,83.125 ccw(c21,82.875)
  region net VLED: 16.64,72.4 ccw(c16.64,72.46) 16.7,72.46 16.7,78.797 cw(c18.328,78.797) 17.177,79.948 ccw(c17,80.125) 17.25,80.125 17.25,82.875 ccw(c17,82.875) 17,83.125 15,83.125 ccw(c15,82.875) 14.75,82.875 14.75,74.237 ccw(c17.29,74.237) 15.494,72.441 15.518,72.418 ccw(c15.56,72.46) 15.56,72.4
  region net +3V3: 4.6,7.64 ccw(c4.54,7.64) 4.54,7.7 -1.797,7.7 cw(c-1.797,9.328) -2.948,8.177 ccw(c-3.125,8) -3.125,8.25 -5.875,8.25 ccw(c-5.875,8) -6.125,8 -6.125,6 ccw(c-5.875,6) -5.875,5.75 2.763,5.75 ccw(c2.763,8.29) 4.559,6.494 4.582,6.518 ccw(c4.54,6.56) 4.6,6.56
  region net NetD4_1: -13,91 cw(c-13.5,91) -13.5,90.5 -16,90.5 cw(c-16,91) -16.5,91 -16.5,96 cw(c-16,96) -16,96.5 -13.5,96.5 cw(c-13.5,96) -13,96
  region net +3V3_SW: -5.875,11.75 -3.125,11.75 ccw(c-3.125,12) -2.948,11.823 cw(c-1.918,10.793) -1.918,12.25 0.88,12.25 ccw(c0.88,14.193) 2.254,12.819 2.305,12.87 ccw(c2.256,12.919) 2.325,12.919 2.325,13.781 ccw(c2.256,13.781) 2.305,13.83 ccw(c1.291,12.816) 1.291,14.25 -5.875,14.25 ccw(c-5.875,14) -6.125,14 -6.125,12 ccw(c-5.875,12)

## Silkscreen, mask and mechanical layers (free items; w line width, h text height)
Top Overlay:
  region: -28.2,-60.8 -27.8,-60.8 -27.8,-62.3 -27.5,-62.3 -28,-62.8 -28.5,-62.3 -28.2,-62.3
  text "SENS+" at -33.734,86.719 h4
  text "OUT+" at -14.134,86.719 h4
  text "OUT-" at 5.269,86.719 h4
  text "SENS-" at 23.17,86.719 h4
  text "Bat_Source" at -31.852,78.63 h10
  text "VLED" at 6.93,72.359 h2
  text "GND" at 7.713,69.359 h2
  text "IM0" at -11.365,40.022 h2
  text "IM2" at -21.36,40 h2
  text "IM1" at -16.244,40 h2
  text "1" at -21.736,37.857 h2
  text "1" at -16.736,37.857 h2
  text "1" at -11.736,37.857 h2
  text "PS1-1 / Serial / Number" at -43.19,35.153 h3
  text "0" at -21.917,34.868 h2
  text "0" at -16.917,34.868 h2
  text "0" at -11.917,34.868 h2
  text "GND" at 9.5,2.359 h2
  text "GND" at 37.5,2.359 h2
  text "+3V3_STBY" at -34.5,1.526 h2
  text "+3V3" at 9.5,-0.632 h2
  text "+15V" at 37.5,-0.632 h2
  text "GND" at -34.5,-1.641 h2
  text "+3V3_OFF" at -34.5,-4.474 h2
  text "VCC_ISO" at -9.498,-26.474 h2
  text "GND_ISO" at -9.5,-29.474 h2
  text "Programming" at -22.551,-58.567 h2.5
  text "Reset" at -30.824,-60.288 h2.5
Board:
  lines w0.05: -29,8 ccw(c-28,8) -28,7 -12,7 ccw(c-12,8) -11,8 -11,29.73 ccw(c-12.27,29.73) -12.27,31 -28,31 ccw(c-28,30) -29,30 -29,8 ; -2,50 ccw(c-1,50) -1,49 27,49 ccw(c27,50) 28,50 28,60 ccw(c27,60) 27,61 -1,61 ccw(c-1,60) -2,60 -2,50 ; 17,8 ccw(c18,8) 18,7 34,7 ccw(c34,8) 35,8 35,27 ccw(c34,27) 34,28 18,28 ccw(c18,27) 17,27 17,8
  lines w0.2: -44,20.5 cw(c-43,20.5) -43,21.5 -34,21.5 ccw(c-34,22.5) -33,22.5 -33,33.5 ccw(c-34,33.5) -34,34.5 -43,34.5 cw(c-43,35.5) -44,35.5 ; -44,20.5 -44,35.5 ; -44,20.5 -44,-62.5 ccw(c-43,-62.5) -43,-63.5 -38,-63.5 cw(c-38,-67.5) -34,-67.5 -34,-70.5 ccw(c-33,-70.5) -33,-71.5 33,-71.5 ccw(c33,-70.5) 34,-70.5 34,-67.5 cw(c38,-67.5) 38,-63.5 43,-63.5 ccw(c43,-62.5) 44,-62.5 44,89.5 ccw(c43,89.5) 43,90.5 38,90.5 cw(c38,94.5) 34,94.5 34,97.5 ccw(c33,97.5) 33,98.5 -33,98.5 ccw(c-33,97.5) -34,97.5 -34,94.5 cw(c-38,94.5) -38,90.5 -43,90.5 ccw(c-43,89.5) -44,89.5 -44,35.5 ; -23,-67 ccw(c-22,-67) -22,-68 -10,-68 ccw(c-10,-67) -9,-67 -9,-61 ccw(c-10,-61) -10,-60 -22,-60 ccw(c-22,-61) -23,-61 -23,-67
  text "CUTOUT" at 3.838,53.398 h5
  text "CUTOUT" at -29.162,17.398 h5
  text "CUTOUT" at 18.67,16.219 h4
  text "CUTOUT" at -22.414,-65.121 h3.5
Top 3D Body:
  lines w0.254: -40.5,-61 -40.5,61 40.5,61 40.5,-61 -40.5,-61

## Text inside footprints (layer, text, board x,y; h text height)
J1: Top Overlay "1" at -8.236,-16.773 h2; Bottom Overlay "1" at -9.264,-14.673 h2
J2: Top Overlay "1" at 8.357,-14.264 h2 r270; Bottom Overlay "1" at 8.357,-14.436 h2 r270
J3: Top Overlay "1" at -8.736,-37.143 h2; Bottom Overlay "1" at -8.264,-37.173 h2
J4: Top Overlay "24" at 30.488,-67.927 h2 r90; Top Overlay "23" at 30.477,-65.39 h2 r90; Top Overlay "2" at -0.881,-67.426 h2 r90; Top Overlay "1" at -0.881,-64.696 h2 r90; Bottom Overlay "24" at 30.742,-66.073 h2 r90; Bottom Overlay "23" at 30.731,-63.53 h2 r90; Bottom Overlay "2" at -1.643,-66.574 h2 r90; Bottom Overlay "1" at -1.643,-64.224 h2 r90
M2: Top Assembly "000000" at -42.356,72.551 h3